# EAGLE board EMS-panel (EAGLE 7.2.0)
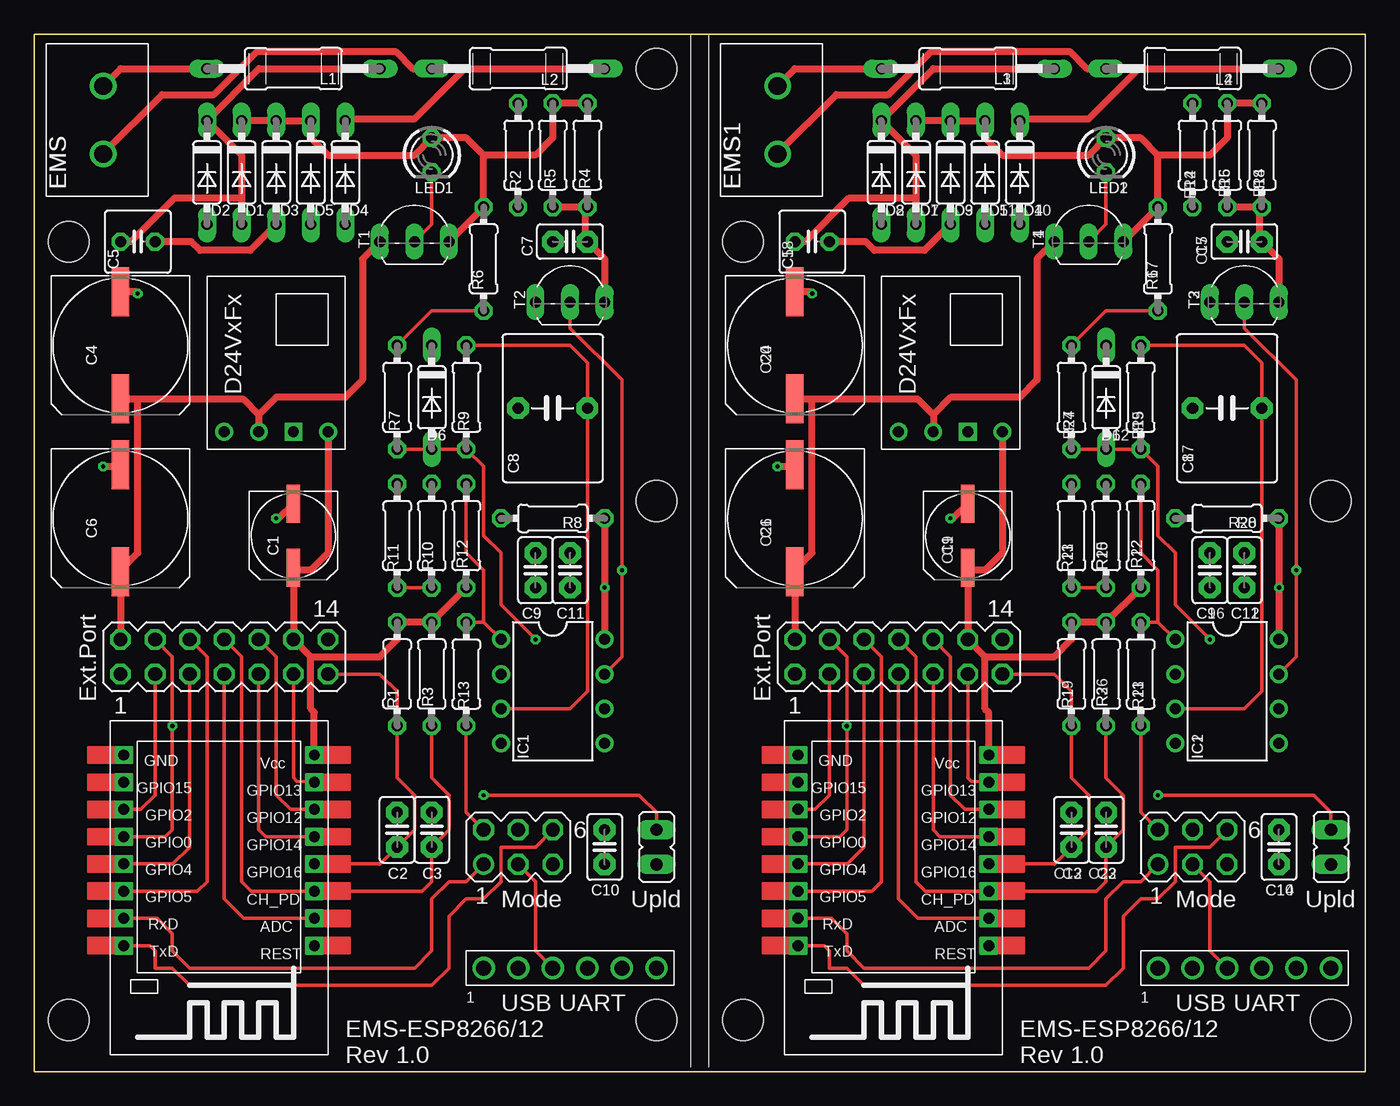
[diagram p0: board, top side]
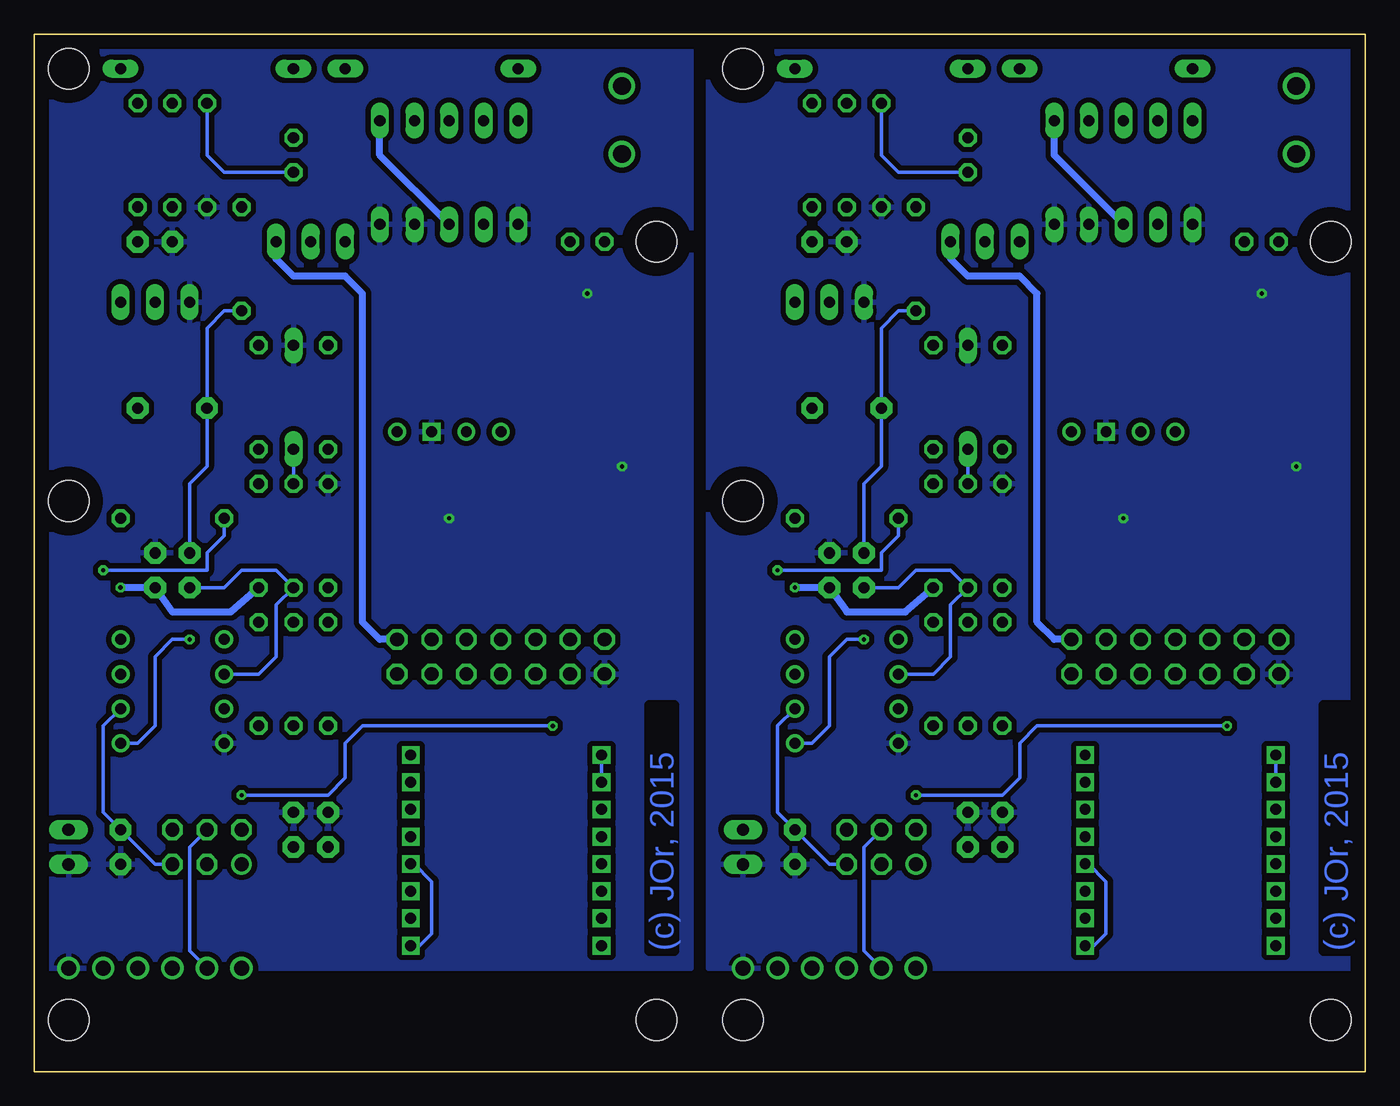
[diagram p1: board, bottom side, seen from below]

Size 97.79 x 76.2 mm. Coordinates in mm from the lower left corner, seen from the top.
Outline: 0,76.2 0,0.33
Outline: 48.25,76.2 0,76.2
Outline: 97.78,0.33 97.78,76.2 49.53,76.2
Outline: 0,76.2 97.79,76.2 97.79,0 0,0 0,76.2
Copper layers (1*16): Top 0.035mm / dielectric 1.5mm / Bottom 0.035mm
Design rules "default": minimum track width 10mil, minimum drill 24mil, track to track 8mil, track to pad 8mil, pad to pad 8mil, via to via 8mil, smd to smd 8mil, copper to edge 40mil, drill to drill 8mil, minimum pad ring 10mil, minimum via ring 8mil, stop-mask expansion 4mil, vias tented up to drill 0mil, thermal gap 10mil
Net classes: 0 default: width 0.254 mm, drill 0.2 mm, clearance 0.254 mm; 1 pwr: width 0.508 mm, drill 0.2 mm, clearance 0.205 mm to class 0, clearance 0.254 mm; 2 signal: width 0.254 mm, drill 0.2 mm, clearance 0.205 mm to class 0, clearance 0.205 mm to class 1, clearance 0.205 mm
Holes 3 mm at 45.72,73.66 45.72,3.81 2.54,3.81 45.72,41.91 2.54,60.96 95.25,73.66 95.25,3.81 52.07,3.81 95.25,41.91 52.07,60.96

## Footprints (pad centres in the part's own frame; a part is rotated, then mirrored left to right if it is on the bottom)
UD-6,3X5,8_NICHICON = smd 2.8 x 1: + 2.35,0; - -2.35,0
C2.5-2 = drill 0.813 pad 1.6 octagon: 1 -1.27,0; 2 1.27,0
UD-10X10_NICHICON = smd 3.6 x 1.3: + 3.925,0; - -3.95,0
C025-050X050 = drill 0.813 octagon: 1 -1.27,0; 2 1.27,0
C5B11 = drill 0.813 pad 1.6 octagon: 1 1.27,5.56; 2 6.35,5.56
DO35-7 = drill 0.813 long: A 3.81,0; C -3.81,0
691102710002 = drill 1.3: 1 -5,0; 2 0,0
ESP-12 = drill 0.8 square: ADC 10,1; CH_PD 12,1; GND 22,15; GPIO0 16,15; GPIO2 18,15; GPIO4 14,15; GPIO5 12,15; GPIO12 18,1; GPIO13 20,1; GPIO14 16,1; GPIO15 20,15; GPIO16 14,1; REST 8,1; RXD 10,15; TXD 8,15; VCC 22,1
MA07-2 = drill 1.016 octagon: 1 -7.62,-1.27; 2 -7.62,1.27; 3 -5.08,-1.27; 4 -5.08,1.27; 5 -2.54,-1.27; 6 -2.54,1.27; 7 0,-1.27; 8 0,1.27; 9 2.54,-1.27; 10 2.54,1.27; 11 5.08,-1.27; 12 5.08,1.27; 13 7.62,-1.27; 14 7.62,1.27
DIL08 = drill 0.813 pad 1.27: 1 -3.81,-3.81; 2 -1.27,-3.81; 3 1.27,-3.81; 4 3.81,-3.81; 5 3.81,3.81; 6 1.27,3.81; 7 -1.27,3.81; 8 -3.81,3.81
MICC12 = drill 0.813 long: 1 -6.35,0; 2 6.35,0
LED3MM = drill 0.813 octagon: A -1.27,0; K 1.27,0
D24VXFX = drill 0.8: /SHDN 11.43,1.27; VIN 11.43,3.81; VOUT 11.43,8.89 | drill 0.8 square: GND 11.43,6.35
MA03-2 = drill 1.016: 1 -2.54,-1.27 | drill 1.016 octagon: 2 -2.54,1.27; 3 0,-1.27; 4 0,1.27; 5 2.54,-1.27; 6 2.54,1.27
61300611121 = drill 1.1: 1 -6.35,0; 2 -3.81,0; 3 -1.27,0; 4 1.27,0; 5 3.81,0; 6 6.35,0
0204/7 = drill 0.813 octagon: 1 -3.81,0; 2 3.81,0
TO92-EBC = drill 0.813 long: B 0,-1.27; C 2.54,-1.27; E -2.54,-1.27
JP1 = drill 0.914 long: 1 0,-1.27; 2 0,1.27

## Placement (x,y rotation side)
C1  220u  [UD-6,3X5,8_NICHICON]  19.05,39.37 270 top
C2  100p  [C2.5-2]  26.67,17.78 90 top
C3  1n  [C2.5-2]  29.21,17.78 90 top
C4  820u  [UD-10X10_NICHICON]  6.35,53.34 270 top
C5  68p  [C025-050X050]  7.62,60.96 0 top
C6  820u  [UD-10X10_NICHICON]  6.35,40.64 270 top
C7  1.5n  [C2.5-2]  39.37,60.96 180 top
C8  10u  [C5B11]  34.29,43.18 0 top
C9  1n  [C2.5-2]  36.83,36.83 270 top
C10  10n  [C2.5-2]  41.91,16.51 270 top
C11  100n  [C2.5-2]  39.37,36.83 270 top
C12  100n  [C2.5-2]  88.9,36.83 270 top
C13  100p  [C2.5-2]  76.2,17.78 90 top
C14  10n  [C2.5-2]  91.44,16.51 270 top
C15  1.5n  [C2.5-2]  88.9,60.96 180 top
C16  1n  [C2.5-2]  86.36,36.83 270 top
C17  10u  [C5B11]  83.82,43.18 0 top
C18  68p  [C025-050X050]  57.15,60.96 0 top
C19  220u  [UD-6,3X5,8_NICHICON]  68.58,39.37 270 top
C20  820u  [UD-10X10_NICHICON]  55.88,53.34 270 top
C21  820u  [UD-10X10_NICHICON]  55.88,40.64 270 top
C22  1n  [C2.5-2]  78.74,17.78 90 top
D1  BAT46  [DO35-7]  15.24,66.04 270 top
D2  BAT46  [DO35-7]  12.7,66.04 270 top
D3  BAT46  [DO35-7]  17.78,66.04 270 top
D4  BAT46  [DO35-7]  22.86,66.04 270 top
D5  BAT46  [DO35-7]  20.32,66.04 270 top
D6  1N4148  [DO35-7]  29.21,49.53 270 top
D7  BAT46  [DO35-7]  64.77,66.04 270 top
D8  BAT46  [DO35-7]  62.23,66.04 270 top
D9  BAT46  [DO35-7]  67.31,66.04 270 top
D10  BAT46  [DO35-7]  72.39,66.04 270 top
D11  BAT46  [DO35-7]  69.85,66.04 270 top
D12  1N4148  [DO35-7]  78.74,49.53 270 top
EMS  EMS  [691102710002]  5.08,72.39 90 top
EMS1  EMS  [691102710002]  54.61,72.39 90 top
ESP1  ESP-12ESP-12  [ESP-12]  21.59,1.27 90 top
ESP2  ESP-12ESP-12  [ESP-12]  71.12,1.27 90 top
EXT.PORT  Ext  [MA07-2]  13.97,30.48 0 top
EXT.PORT1  Ext  [MA07-2]  63.5,30.48 0 top
IC1  LM393N  [DIL08]  38.1,27.94 270 top
IC2  LM393N  [DIL08]  87.63,27.94 270 top
L1  4.7uH  [MICC12]  19.05,73.66 0 top
L2  4.7uH  [MICC12]  35.56,73.66 180 top
L3  4.7uH  [MICC12]  68.58,73.66 0 top
L4  4.7uH  [MICC12]  85.09,73.66 180 top
LED1  3mm  [LED3MM]  29.21,67.31 270 top
LED2  3mm  [LED3MM]  78.74,67.31 270 top
MOD1  D24V3F3  [D24VXFX]  12.7,58.42 270 top
MOD2  D24V3F3  [D24VXFX]  62.23,58.42 270 top
MODE  [MA03-2]  35.56,16.51 0 top
MODE1  [MA03-2]  85.09,16.51 0 top
PROGRAM  61300611121  [61300611121]  39.37,7.62 0 top
PROGRAM1  61300611121  [61300611121]  88.9,7.62 0 top
R1  4k7  [0204/7]  26.67,29.21 90 top
R2  10K  [0204/7]  35.56,67.31 270 top
R3  4k7  [0204/7]  29.21,29.21 90 top
R4  470R  [0204/7]  40.64,67.31 270 top
R5  470R  [0204/7]  38.1,67.31 270 top
R6  10K  [0204/7]  33.02,59.69 90 top
R7  360R  [0204/7]  26.67,49.53 270 top
R8  4K7  [0204/7]  38.1,40.64 180 top
R9  47K  [0204/7]  31.75,49.53 270 top
R10  10K  [0204/7]  29.21,39.37 90 top
R11  100K  [0204/7]  26.67,39.37 90 top
R12  4K7  [0204/7]  31.75,39.37 90 top
R13  100  [0204/7]  31.75,29.21 270 top
R14  10K  [0204/7]  85.09,67.31 270 top
R15  47K  [0204/7]  81.28,49.53 270 top
R16  470R  [0204/7]  87.63,67.31 270 top
R17  10K  [0204/7]  82.55,59.69 90 top
R18  470R  [0204/7]  90.17,67.31 270 top
R19  4k7  [0204/7]  76.2,29.21 90 top
R20  4K7  [0204/7]  87.63,40.64 180 top
R21  100  [0204/7]  81.28,29.21 270 top
R22  4K7  [0204/7]  81.28,39.37 90 top
R23  100K  [0204/7]  76.2,39.37 90 top
R24  360R  [0204/7]  76.2,49.53 270 top
R25  10K  [0204/7]  78.74,39.37 90 top
R26  4k7  [0204/7]  78.74,29.21 90 top
T1  BC547B  [TO92-EBC]  27.94,62.23 0 top
T2  BC547B  [TO92-EBC]  39.37,57.78 0 top
T3  BC547B  [TO92-EBC]  88.9,57.78 0 top
T4  BC547B  [TO92-EBC]  77.47,62.23 0 top
UPLD  Upload  [JP1]  45.72,16.51 0 top
UPLD1  Upload  [JP1]  95.25,16.51 0 top

## Library data of the parts
C1 C19 = rcl; CONRAD: VF 220/6,3 P-D
C2 C7 C10-C15 = capacitor-wima
C3 C9 C16 C22 = capacitor-wima; CONRAD: 453005-62
C4 C6 C20 C21 = rcl; CONRAD: VF 820/16 P-G
C5 C18 = resistor; CONRAD: 457221-62
C8 C17 = capacitor-wima; CONRAD: 450662-62
D1-D5 D7-D11 = diode; CONRAD: 153087-62
D6 D12 = diode; CONRAD: 162280-62
EMS EMS1 = EagleLibrary_Wuerth_Elektronik_eiCan_Terminal_Blocks_Connectors_v6_20150113
ESP1 ESP2 = ESP8266-ESP12
EXT.PORT EXT.PORT1 MODE MODE1 = con-lstb; OC_FARNELL: unknown; OC_NEWARK: unknown
IC1 IC2 = linear
L1-L4 = inductors; CONRAD: 440391-62
LED1 LED2 = led
MOD1 MOD2 = buckconv
PROGRAM PROGRAM1 = EagleLibrary_Wuerth_Elektronik_eiCan_Board_to_Board_Connectors_v6_20150113
R1-R26 = resistor
T1-T4 = transistor
UPLD UPLD1 = jumper

## Nets
+3V1 [pwr]: C12.2 C19.+ ESP2.VCC EXT.PORT1.12 IC2.8 MOD2.VOUT R19.2 R20.1 R22.1 R26.2
+3V3 [pwr]: C1.+ C11.2 ESP1.VCC EXT.PORT.12 IC1.8 MOD1.VOUT R1.2 R3.2 R8.1 R12.1
ADC [signal]: ESP1.ADC EXT.PORT.7
ADC1 [signal]: ESP2.ADC EXT.PORT1.7
CH_PD [signal]: C3.1 ESP1.CH_PD EXT.PORT.8 R3.1
CH_PD1 [signal]: C22.1 ESP2.CH_PD EXT.PORT1.8 R26.1
EMS_RX [signal]: C10.1 IC1.6 MODE.5
EMS_RX1 [signal]: C14.1 IC2.6 MODE1.5
EMS_TX [signal]: MODE.2 R13.2
EMS_TX1 [signal]: MODE1.2 R21.2
GND [pwr]: C1.- C2.2 C3.2 C4.- C6.- C7.2 C10.2 C11.1 D2.A D4.A D5.A D6.C EXT.PORT.1 IC1.4 MOD1.GND PROGRAM.6 R2.2 R11.2 T2.E UPLD.1
GND1 [pwr]: C12.1 C13.2 C14.2 C15.2 C19.- C20.- C21.- C22.2 D8.A D10.A D11.A D12.C EXT.PORT1.1 IC2.4 MOD2.GND PROGRAM1.6 R14.2 R23.2 T3.E UPLD1.1
GPIO0 [signal]: ESP1.GPIO0 EXT.PORT.4 UPLD.2
GPIO1 [signal]: ESP2.GPIO2 EXT.PORT1.3
GPIO2 [signal]: ESP1.GPIO2 EXT.PORT.3
GPIO3 [signal]: ESP2.GPIO4 EXT.PORT1.5
GPIO4 [signal]: ESP1.GPIO4 EXT.PORT.5
GPIO5: ESP1.GPIO5 EXT.PORT.6
GPIO6 [signal]: ESP2.GPIO13 EXT.PORT1.11
GPIO7 [signal]: ESP2.GPIO12 EXT.PORT1.10
GPIO8 [signal]: ESP2.GPIO14 EXT.PORT1.9
GPIO9 [signal]: ESP2.GPIO0 EXT.PORT1.4 UPLD1.2
GPIO10: ESP2.GND ESP2.GPIO15
GPIO11: ESP2.GPIO5 EXT.PORT1.6
GPIO12 [signal]: ESP1.GPIO12 EXT.PORT.10
GPIO13 [signal]: ESP1.GPIO13 EXT.PORT.11
GPIO14 [signal]: ESP1.GPIO14 EXT.PORT.9
GPIO15: ESP1.GND ESP1.GPIO15
N$1 [pwr]: C5.1 D1.A D2.C L1.2
N$2 [pwr]: C5.2 D3.A D4.C L2.1
N$3 [pwr]: C18.2 D9.A D10.C L4.1
N$4 [pwr]: EMS.2 L1.1
N$5: IC1.1 R12.2 R13.1
N$6 [pwr]: C7.1 R4.2 R5.2 T2.C
N$7: C8.1 C9.1 R6.1 R7.1
N$8 [pwr]: EMS.1 L2.2
N$9: C8.2 IC1.3 R9.1
N$10: C16.1 C17.1 R17.1 R24.1
N$11 [pwr]: C18.1 D7.A D8.C L3.2
N$12: C9.2 IC1.2 R10.1 R11.1
N$13: C16.2 IC2.2 R23.1 R25.1
N$14: IC2.1 R21.1 R22.2
N$15: IC1.7 R8.2 T2.B
N$16: IC2.7 R20.2 T3.B
N$17: LED1.K R2.1 T1.B
N$18 [pwr]: C15.1 R16.2 R18.2 T3.C
N$19: C17.2 IC2.3 R15.1
N$20: LED2.K R14.1 T4.B
N$21 [pwr]: EMS1.1 L4.2
N$22 [pwr]: EMS1.2 L3.1
REST [signal]: C2.1 ESP1.GPIO16 ESP1.REST EXT.PORT.13 R1.1
REST1 [signal]: C13.1 ESP2.GPIO16 ESP2.REST EXT.PORT1.13 R19.1
RXD [signal]: MODE.4 PROGRAM.2
RXD1 [signal]: MODE1.4 PROGRAM1.2
TXD [signal]: MODE.3 PROGRAM.3
TXD1 [signal]: MODE1.3 PROGRAM1.3
UBUCK [pwr]: C4.+ C6.+ EXT.PORT.2 MOD1.VIN T1.E
UBUCK1 [pwr]: C20.+ C21.+ EXT.PORT1.2 MOD2.VIN T4.E
UEMS [pwr]: D1.C D3.C D5.C EXT.PORT.14 LED1.A R4.1 R5.1 R6.2 T1.C
UEMS1 [pwr]: D7.C D9.C D11.C EXT.PORT1.14 LED2.A R16.1 R17.2 R18.1 T4.C
UREF: D6.A IC1.5 R7.2 R9.2 R10.2
UREF1: D12.A IC2.5 R15.2 R24.2 R25.2
URXD [signal]: ESP1.RXD MODE.1
URXD1 [signal]: ESP2.RXD MODE1.1
UTXD: ESP1.TXD MODE.6
UTXD1: ESP2.TXD MODE1.6

## Tracks (layer width: path | path; a pad name or v marks a point on that pad's centre or on a via)
+3V1  (via drill 0.3)
  Top 0.508: ESP2.VCC 70.12,26.4 69.85,26.67 69.85,30.48 | 69.85,30.48 EXT.PORT1.12 C19.+ 68.77,36.83 69.85,36.83 71.12,38.1 MOD2.VOUT | 69.85,30.48 74.93,30.48 76.2,31.75 R19.2 R26.2 R22.1 | R20.1 v91.44,35.56 IC2.8
  Bottom 0.508: R22.1 83.31,33.78 87.63,33.78 C12.2 v91.44,35.56
+3V3  (via drill 0.3)
  Top 0.508: ESP1.VCC 20.59,26.4 20.32,26.67 20.32,30.48 | 20.32,30.48 EXT.PORT.12 C1.+ 19.24,36.83 20.32,36.83 21.59,38.1 MOD1.VOUT | 20.32,30.48 25.4,30.48 26.67,31.75 R1.2 R3.2 R12.1 | R8.1 v41.91,35.56 IC1.8
  Bottom 0.508: R12.1 33.78,33.78 38.1,33.78 C11.2 v41.91,35.56
ADC
  Top 0.254: ESP1.ADC 15.4,11.27 13.97,12.7 EXT.PORT.7
ADC1
  Top 0.254: ESP2.ADC 64.93,11.27 63.5,12.7 EXT.PORT1.7
CH_PD
  Top 0.254: EXT.PORT.8 15.24,30.48 15.24,13.97 15.94,13.27 ESP1.CH_PD 28.51,13.27 29.21,13.97 C3.1 30.48,17.78 30.48,20.32 29.21,21.59 R3.1
CH_PD1
  Top 0.254: EXT.PORT1.8 64.77,30.48 64.77,13.97 65.47,13.27 ESP2.CH_PD 78.04,13.27 78.74,13.97 C22.1 80.01,17.78 80.01,20.32 78.74,21.59 R26.1
EMS_RX
  Bottom 0.254: IC1.6 43.18,25.4 43.18,19.05 C10.1 39.37,15.24 MODE.5
EMS_RX1
  Bottom 0.254: IC2.6 92.71,25.4 92.71,19.05 C14.1 88.9,15.24 MODE1.5
EMS_TX
  Top 0.254: R13.2 31.75,19.05 MODE.2
EMS_TX1
  Top 0.254: R21.2 81.28,19.05 MODE1.2
GND  (via drill 0.3)
  Top 0.508: v7.62,57.15 7.49,57.28 6.35,57.28 C4.- | v5.08,44.45 6.49,44.45 C6.- | v17.78,40.64 17.97,40.64 C1.-
  pour Bottom (isolate 0.381): 48.26,76.2 48.26,7.62 0,7.62 0,76.2
GND1  (via drill 0.3)
  Top 0.508: v57.15,57.15 57.02,57.28 55.88,57.28 C20.- | v54.61,44.45 56.02,44.45 C21.- | v67.31,40.64 67.5,40.64 C19.-
  pour Bottom (isolate 0.381): 97.79,76.2 97.79,7.62 49.53,7.62 49.53,76.2
GPIO0  (via drill 0.3)
  Top 0.254: EXT.PORT.4 10.16,30.48 v10.16,25.4 10.16,17.78 9.65,17.27 ESP1.GPIO0 | UPLD.2 45.72,19.05 44.45,20.32 v33.02,20.32
  Bottom 0.254: v10.16,25.4 24.13,25.4 25.4,24.13 25.4,21.59 26.67,20.32 v33.02,20.32
GPIO1
  Top 0.254: ESP2.GPIO2 57.37,19.27 58.42,20.32 EXT.PORT1.3
GPIO2
  Top 0.254: ESP1.GPIO2 7.84,19.27 8.89,20.32 EXT.PORT.3
GPIO3
  Top 0.254: ESP2.GPIO4 59.66,15.27 59.69,15.24 60.96,16.51 EXT.PORT1.5
GPIO4
  Top 0.254: ESP1.GPIO4 10.13,15.27 10.16,15.24 11.43,16.51 EXT.PORT.5
GPIO5
  Top 0.254: ESP1.GPIO5 12,13.27 12.7,13.97 12.7,30.48 EXT.PORT.6
GPIO6
  Top 0.254: EXT.PORT1.11 68.58,21.59 68.83,21.34 ESP2.GPIO13
GPIO7
  Top 0.254: EXT.PORT1.10 67.31,30.48 67.31,20.32 68.36,19.27 ESP2.GPIO12
GPIO8
  Top 0.254: ESP2.GPIO14 66.55,17.27 66.04,17.78 EXT.PORT1.9
GPIO9  (via drill 0.3)
  Top 0.254: EXT.PORT1.4 59.69,30.48 v59.69,25.4 59.69,17.78 59.18,17.27 ESP2.GPIO0 | UPLD1.2 95.25,19.05 93.98,20.32 v82.55,20.32
  Bottom 0.254: v59.69,25.4 73.66,25.4 74.93,24.13 74.93,21.59 76.2,20.32 v82.55,20.32
GPIO10
  Bottom 0.254: ESP2.GND ESP2.GPIO15
GPIO11
  Top 0.254: ESP2.GPIO5 61.53,13.27 62.23,13.97 62.23,30.48 EXT.PORT1.6
GPIO12
  Top 0.254: EXT.PORT.10 17.78,30.48 17.78,20.32 18.83,19.27 ESP1.GPIO12
GPIO13
  Top 0.254: EXT.PORT.11 19.05,21.59 19.3,21.34 ESP1.GPIO13
GPIO14
  Top 0.254: ESP1.GPIO14 17.02,17.27 16.51,17.78 EXT.PORT.9
GPIO15
  Bottom 0.254: ESP1.GND ESP1.GPIO15
N$1
  Top 0.508: L1.2 16.51,73.66 D2.C 15.24,67.31 15.24,64.14 | 15.24,64.14 D1.A | C5.1 7.11,60.96 10.29,64.14 15.24,64.14
N$2
  Top 0.508: L2.1 31.62,73.66 27.94,69.98 22.99,69.98 D4.C | C5.2 11.56,60.96 12.19,60.33 15.88,60.33 D3.A
  Bottom 0.508: D4.C 22.86,67.31 D3.A
N$3
  Top 0.508: L4.1 81.15,73.66 77.47,69.98 72.52,69.98 D10.C | C18.2 61.09,60.96 61.72,60.33 65.41,60.33 D9.A
  Bottom 0.508: D10.C 72.39,67.31 D9.A
N$4
  Top 0.508: L1.1 6.35,73.66 EMS.2
N$5
  Top 0.254: IC1.1 33.02,33.02 | 33.02,33.02 R13.1 | R12.2 31.75,38.1 33.02,36.83 33.02,33.02
N$6
  Top 0.508: R5.2 R4.2 40.51,63.37 40.51,61.09 C7.1 41.91,59.69 T2.C
N$7
  Top 0.254: R6.1 29.21,55.88 R7.1
  Bottom 0.254: R6.1 34.29,55.88 35.56,54.61 C8.1 35.56,44.45 36.83,43.18 C9.1
N$8
  Top 0.508: L2.2 27.81,73.66 26.54,74.93 16.38,74.93 13.21,71.75 9.4,71.75 5.08,67.44 EMS.1
N$9
  Top 0.254: R9.1 39.37,53.34 40.64,52.07 C8.2 40.64,27.94 39.37,26.67 IC1.3
N$10
  Top 0.254: R17.1 78.74,55.88 R24.1
  Bottom 0.254: R17.1 83.82,55.88 85.09,54.61 C17.1 85.09,44.45 86.36,43.18 C16.1
N$11
  Top 0.508: L3.2 66.04,73.66 D8.C 64.77,67.31 64.77,64.14 | 64.77,64.14 D7.A | C18.1 56.64,60.96 59.82,64.14 64.77,64.14
N$12
  Top 0.254: R11.1 R10.1
  Bottom 0.254: IC1.2 31.75,29.21 30.48,30.48 30.48,34.29 R10.1 30.48,36.83 33.02,36.83 34.29,35.56 C9.2
N$13
  Top 0.254: R23.1 R25.1
  Bottom 0.254: IC2.2 81.28,29.21 80.01,30.48 80.01,34.29 R25.1 80.01,36.83 82.55,36.83 83.82,35.56 C16.2
N$14
  Top 0.254: IC2.1 82.55,33.02 | 82.55,33.02 R21.1 | R22.2 81.28,38.1 82.55,36.83 82.55,33.02
N$15  (via drill 0.3)
  Top 0.254: T2.B 39.37,54.61 43.18,50.8 v43.18,36.83 43.18,30.48 IC1.7
  Bottom 0.254: R8.2 34.29,39.37 35.56,38.1 35.56,36.83 v43.18,36.83
N$16  (via drill 0.3)
  Top 0.254: T3.B 88.9,54.61 92.71,50.8 v92.71,36.83 92.71,30.48 IC2.7
  Bottom 0.254: R20.2 83.82,39.37 85.09,38.1 85.09,36.83 v92.71,36.83
N$17
  Top 0.254: LED1.K 29.21,62.23 T1.B
  Bottom 0.254: R2.1 35.56,67.31 34.29,66.04 LED1.K
N$18
  Top 0.508: R16.2 R18.2 90.04,63.37 90.04,61.09 C15.1 91.44,59.69 T3.C
N$19
  Top 0.254: R15.1 88.9,53.34 90.17,52.07 C17.2 90.17,27.94 88.9,26.67 IC2.3
N$20
  Top 0.254: LED2.K 78.74,62.23 T4.B
  Bottom 0.254: R14.1 85.09,67.31 83.82,66.04 LED2.K
N$21
  Top 0.508: L4.2 77.34,73.66 76.07,74.93 65.91,74.93 62.74,71.75 58.93,71.75 54.61,67.44 EMS1.1
N$22
  Top 0.508: L3.1 55.88,73.66 EMS1.2
REST
  Top 0.254: ESP1.GPIO16 25.37,15.27 25.4,15.24 C2.1 27.94,17.78 27.94,20.32 26.67,21.59 R1.1 26.67,27.94 25.4,29.21 EXT.PORT.13
  Bottom 0.254: ESP1.GPIO16 20.35,15.27 19.05,13.97 19.05,10.16 19.94,9.27 ESP1.REST
REST1
  Top 0.254: ESP2.GPIO16 74.9,15.27 74.93,15.24 C13.1 77.47,17.78 77.47,20.32 76.2,21.59 R19.1 76.2,27.94 74.93,29.21 EXT.PORT1.13
  Bottom 0.254: ESP2.GPIO16 69.88,15.27 68.58,13.97 68.58,10.16 69.47,9.27 ESP2.REST
RXD
  Bottom 0.254: MODE.4 36.83,16.51 36.83,8.89 PROGRAM.2
RXD1
  Bottom 0.254: MODE1.4 86.36,16.51 86.36,8.89 PROGRAM1.2
TXD
  Top 0.254: MODE.3 36.83,13.97 36.83,8.89 PROGRAM.3
TXD1
  Top 0.254: MODE1.3 86.36,13.97 86.36,8.89 PROGRAM1.3
UBUCK
  Top 0.508: EXT.PORT.2 C6.+ 6.35,36.83 7.62,38.1 7.62,49.41 | C4.+ 7.62,49.41 | 7.62,49.41 15.36,49.41 16.51,48.26 | 16.51,48.26 MOD1.VIN | T1.E 24.13,59.69 24.13,50.8 22.86,49.53 17.78,49.53 16.51,48.26
UBUCK1
  Top 0.508: EXT.PORT1.2 C21.+ 55.88,36.83 57.15,38.1 57.15,49.41 | C20.+ 57.15,49.41 | 57.15,49.41 64.89,49.41 66.04,48.26 | 66.04,48.26 MOD2.VIN | T4.E 73.66,59.69 73.66,50.8 72.39,49.53 67.31,49.53 66.04,48.26
UEMS
  Top 0.508: R4.1 R5.1 38.1,68.58 36.83,67.31 33.02,67.31 | D1.C D3.C D5.C 20.32,68.58 21.59,67.31 27.94,67.31 LED1.A 31.75,68.58 33.02,67.31 | T1.C R6.2 33.02,67.31
  Bottom 0.508: EXT.PORT.14 22.86,31.75 24.13,33.02 24.13,57.15 25.4,58.42 29.21,58.42 30.48,59.69 T1.C
UEMS1
  Top 0.508: R18.1 R16.1 87.63,68.58 86.36,67.31 82.55,67.31 | D7.C D9.C D11.C 69.85,68.58 71.12,67.31 77.47,67.31 LED2.A 81.28,68.58 82.55,67.31 | T4.C R17.2 82.55,67.31
  Bottom 0.508: EXT.PORT1.14 72.39,31.75 73.66,33.02 73.66,57.15 74.93,58.42 78.74,58.42 80.01,59.69 T4.C
UREF  (via drill 0.3)
  Top 0.254: R7.2 D6.A R9.2 33.02,44.45 33.02,39.37 34.29,38.1 34.29,34.29 v36.83,31.75
  Bottom 0.254: D6.A R10.2 | IC1.5 40.64,24.13 39.37,25.4 39.37,30.48 38.1,31.75 v36.83,31.75
UREF1  (via drill 0.3)
  Top 0.254: R24.2 D12.A R15.2 82.55,44.45 82.55,39.37 83.82,38.1 83.82,34.29 v86.36,31.75
  Bottom 0.254: D12.A R25.2 | IC2.5 90.17,24.13 88.9,25.4 88.9,30.48 87.63,31.75 v86.36,31.75
URXD
  Top 0.254: MODE.1 31.75,13.97 30.48,13.97 29.21,12.7 29.21,8.89 27.94,7.62 11.43,7.62 10.16,8.89 10.16,10.16 9.05,11.27 ESP1.RXD
URXD1
  Top 0.254: MODE1.1 81.28,13.97 80.01,13.97 78.74,12.7 78.74,8.89 77.47,7.62 60.96,7.62 59.69,8.89 59.69,10.16 58.58,11.27 ESP2.RXD
UTXD
  Top 0.254: MODE.6 36.83,16.51 34.29,16.51 34.29,13.97 33.02,12.7 31.75,12.7 30.48,11.43 30.48,7.62 29.21,6.35 11.43,6.35 10.16,7.62 8.89,7.62 8.89,8.89 8.51,9.27 ESP1.TXD
UTXD1
  Top 0.254: MODE1.6 86.36,16.51 83.82,16.51 83.82,13.97 82.55,12.7 81.28,12.7 80.01,11.43 80.01,7.62 78.74,6.35 60.96,6.35 59.69,7.62 58.42,7.62 58.42,8.89 58.04,9.27 ESP2.TXD

## Text on the board
Bottom: (c) JOr, 2015 | (c) JOr, 2015
tPlace: Ext.Port | Ext.Port | Mode | Upld | Mode | Upld | 1 | 1 | USB UART | USB UART
_tNames: L1 | L2 | L1 | L2 | R2 | R5 | R4 | R2 | R5 | R4 | EMS | LED1 | EMS | LED1 | D2 | D1 | D3 | D5 | D4 | D2 | D1 | D3 | D5 | D4 | C7 | C7 | T1 | T1 | C5 | C5 | R6 | R6 | T2 | T2 | C4 | C4 | R7 | R9 | R7 | R9 | D6 | D6 | C8 | C8 | C6 | R8 | C6 | R8 | C1 | C1 | R11 | R10 | R12 | R11 | R10 | R12 | C9 | C11 | C9 | C11 | R13 | R13 | R1 | R3 | R1 | R3 | IC1 | IC1 | C2 | C3 | C2 | C3 | C10 | C10 | EMS-ESP8266/12 / Rev 1.0 | EMS-ESP8266/12 / Rev 1.0